# Altium PCB PetBallLauncher.PcbDoc
Units mil, origin at the board's own origin, x right, y up, seen from the top; angles counter-clockwise.
Board outline 1988.19 x 2165.35 mil, 2 copper layers (Top Layer, Bottom Layer); 31 components, 20 nets, 96 pads, 0 vias.
Unrouted connection lines stored in the file: 1.
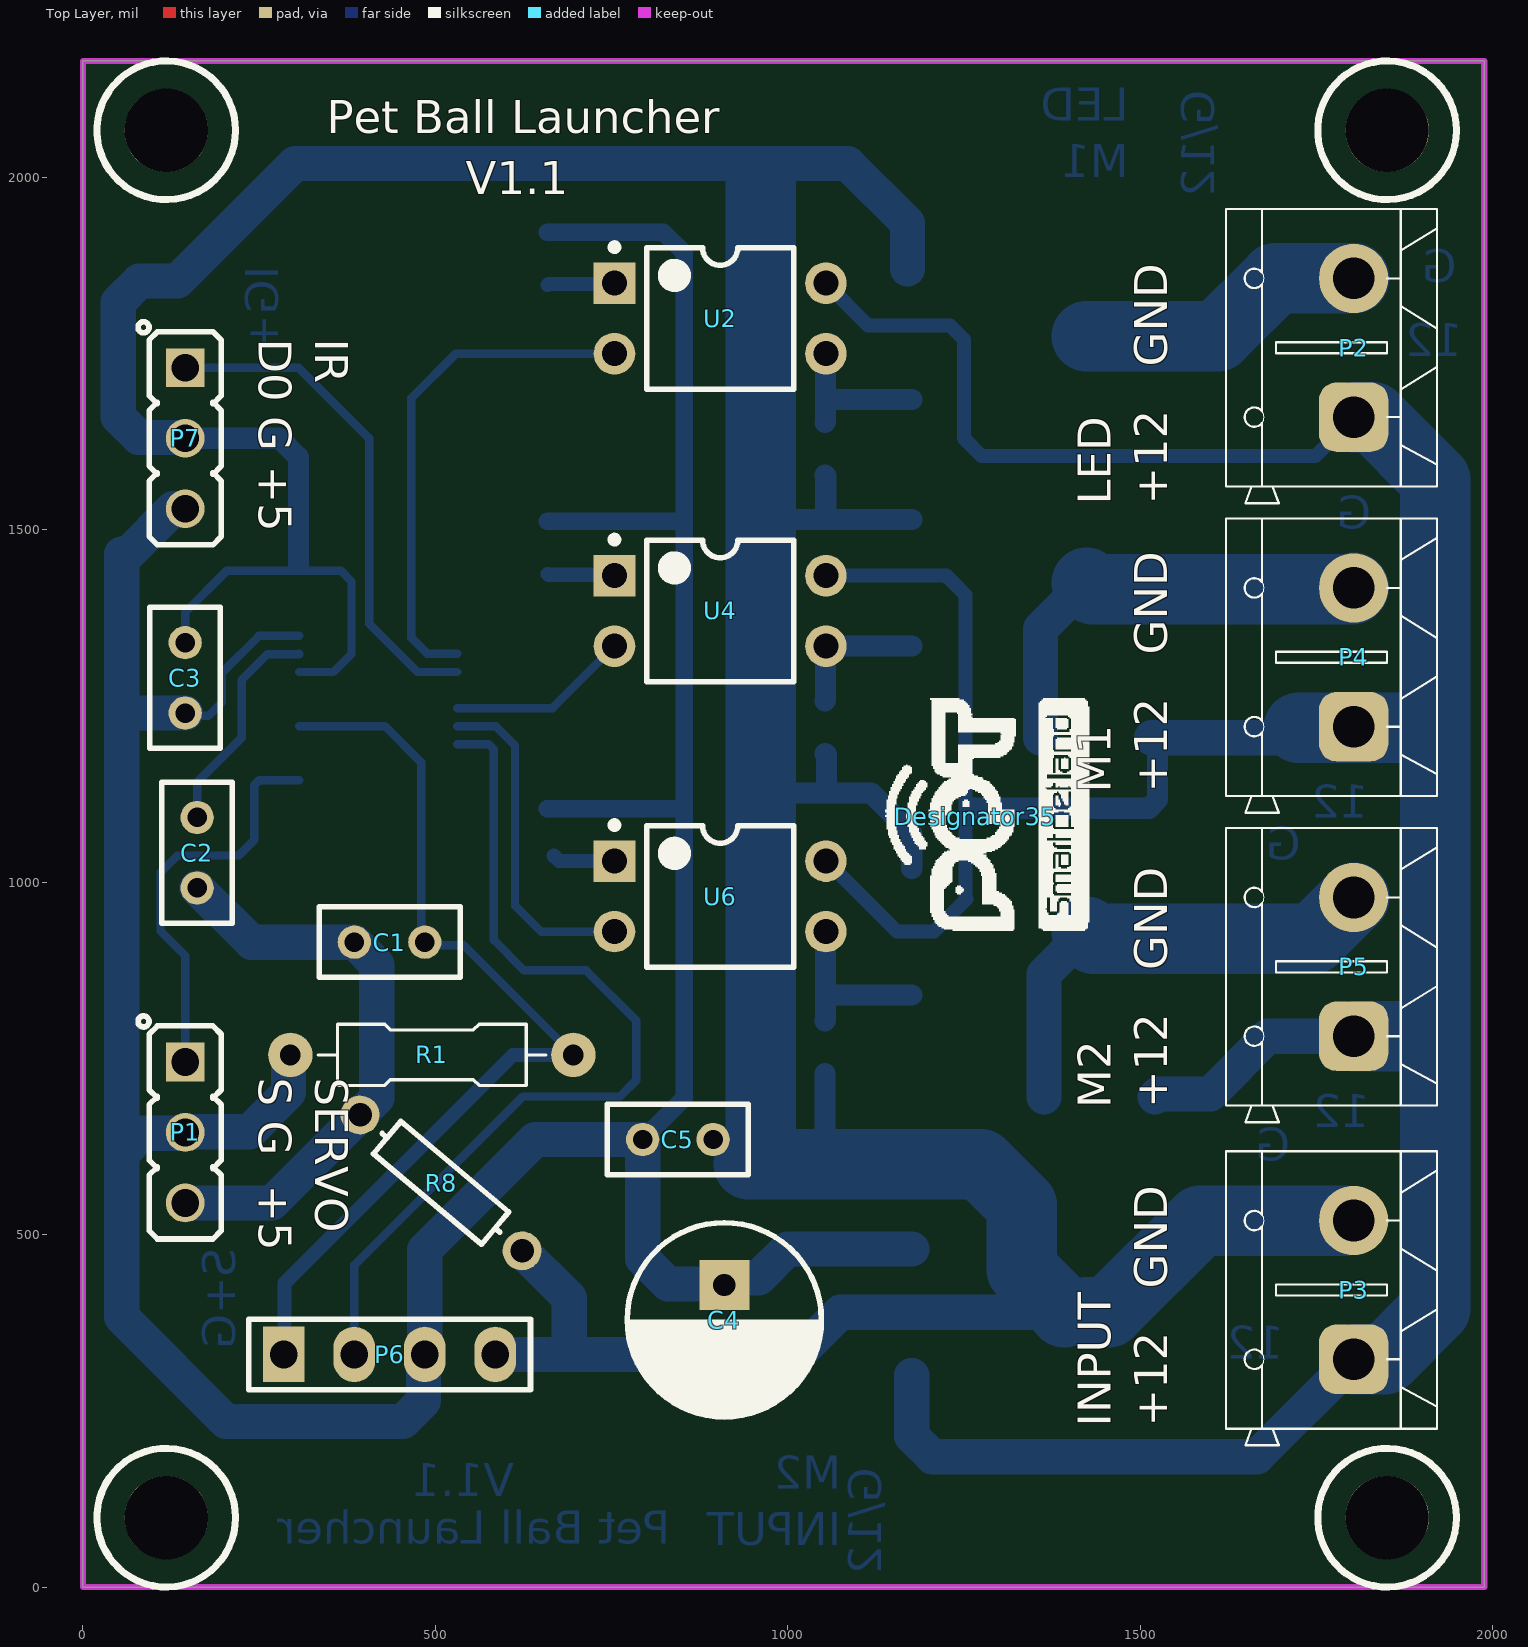
[diagram p0: Top Layer view]
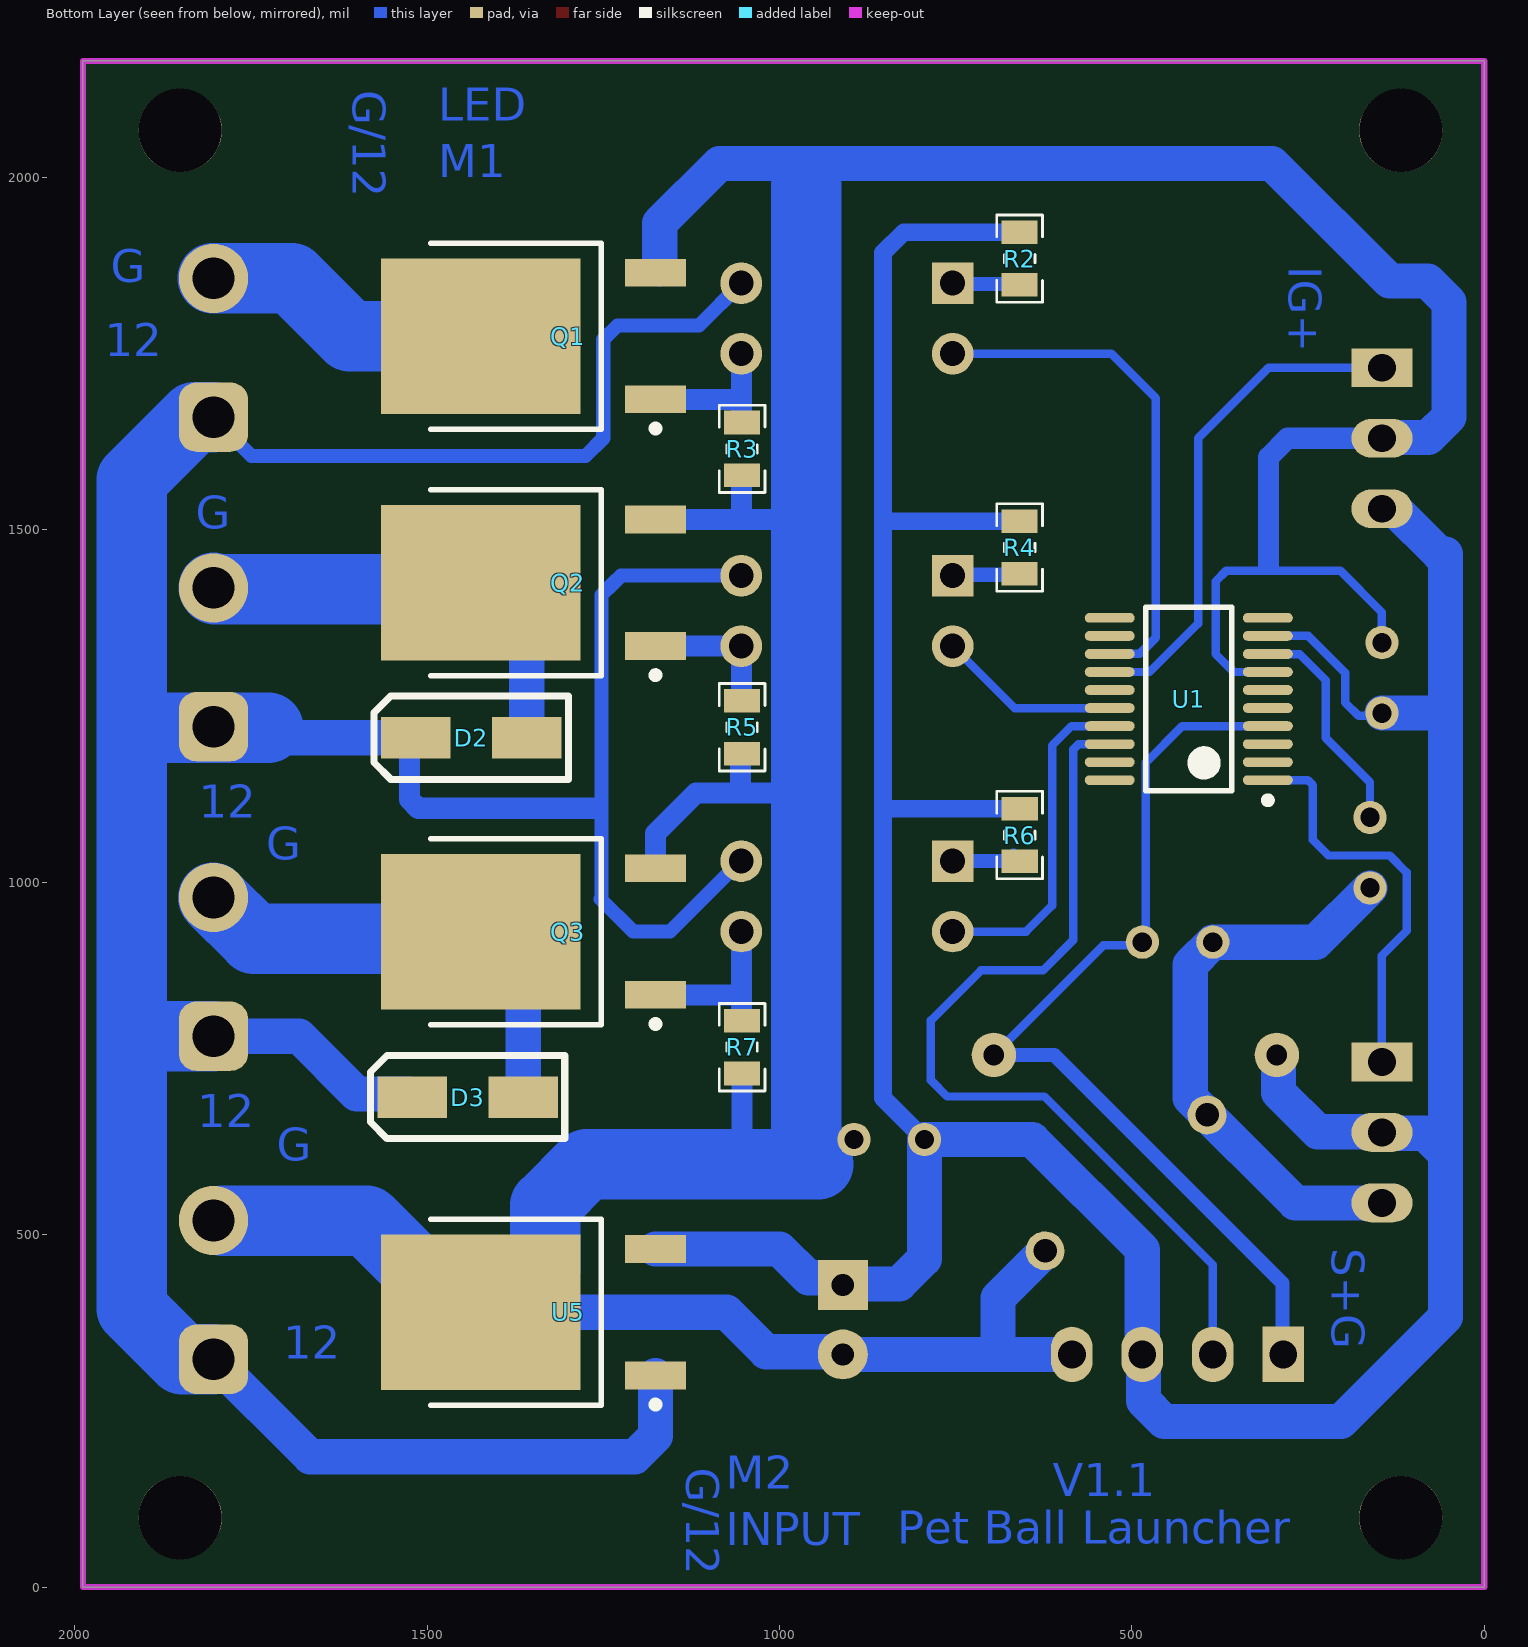
[diagram p1: Bottom Layer view, seen from below]
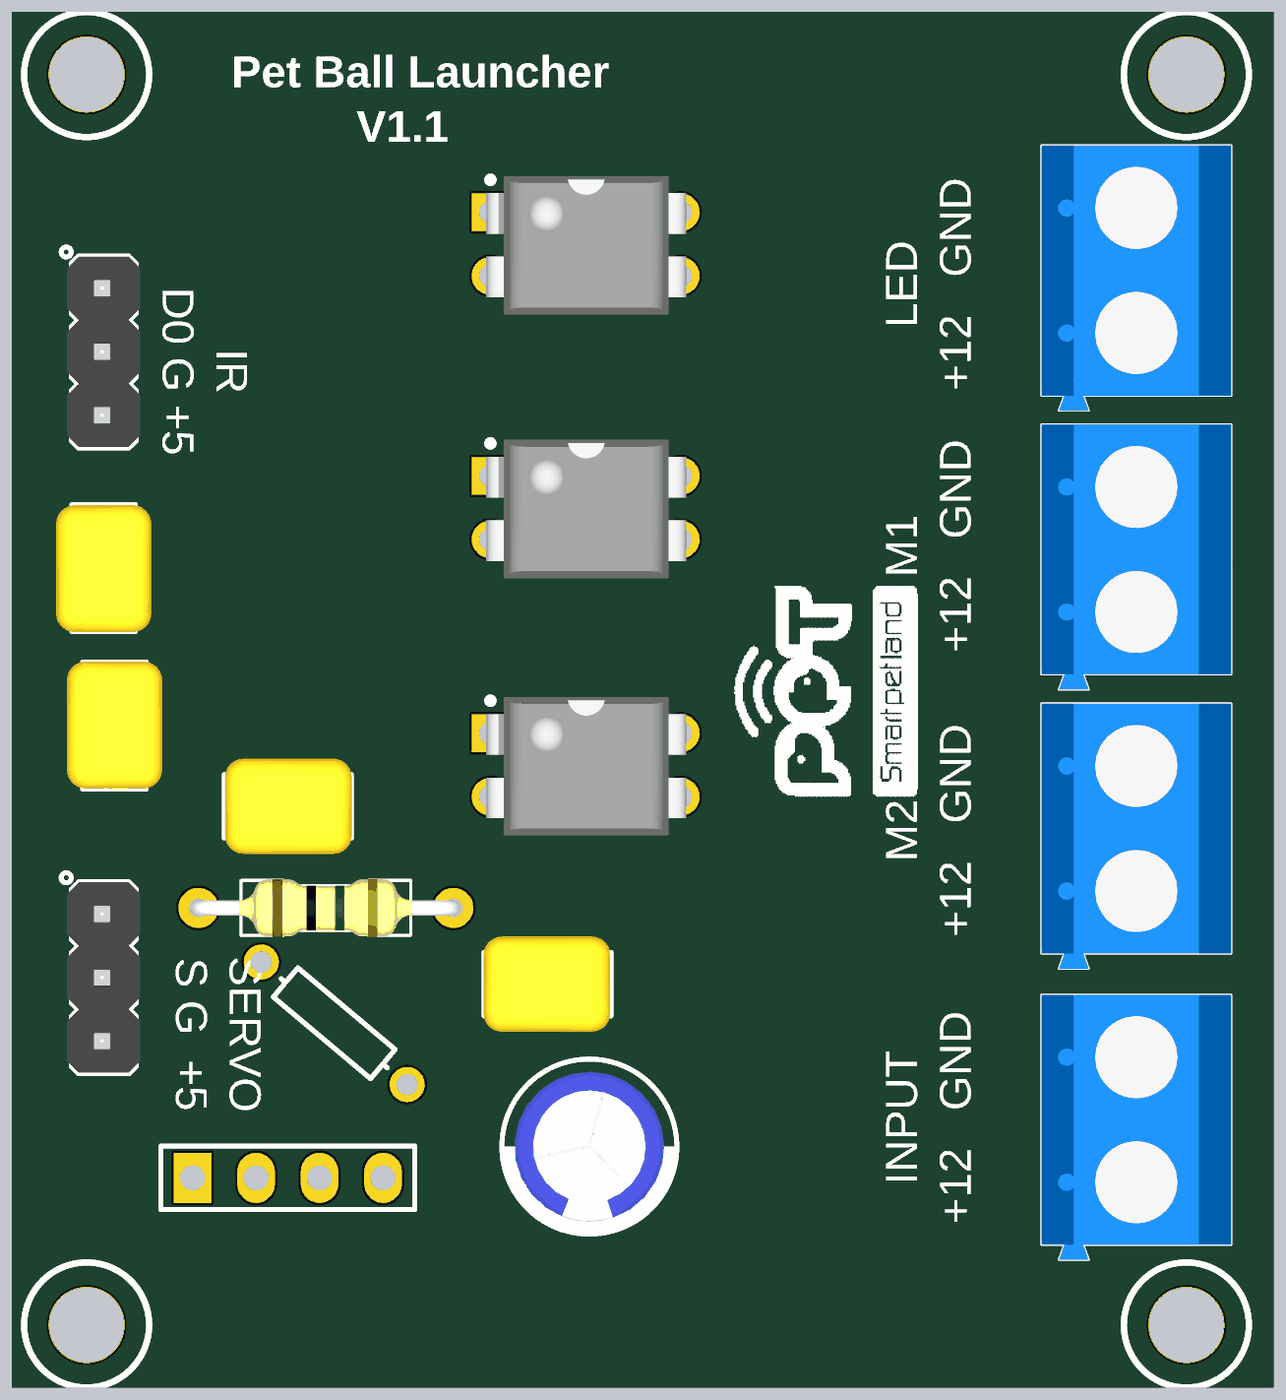
[diagram p2: 3D render of the assembled board from above, using the file's embedded part models]
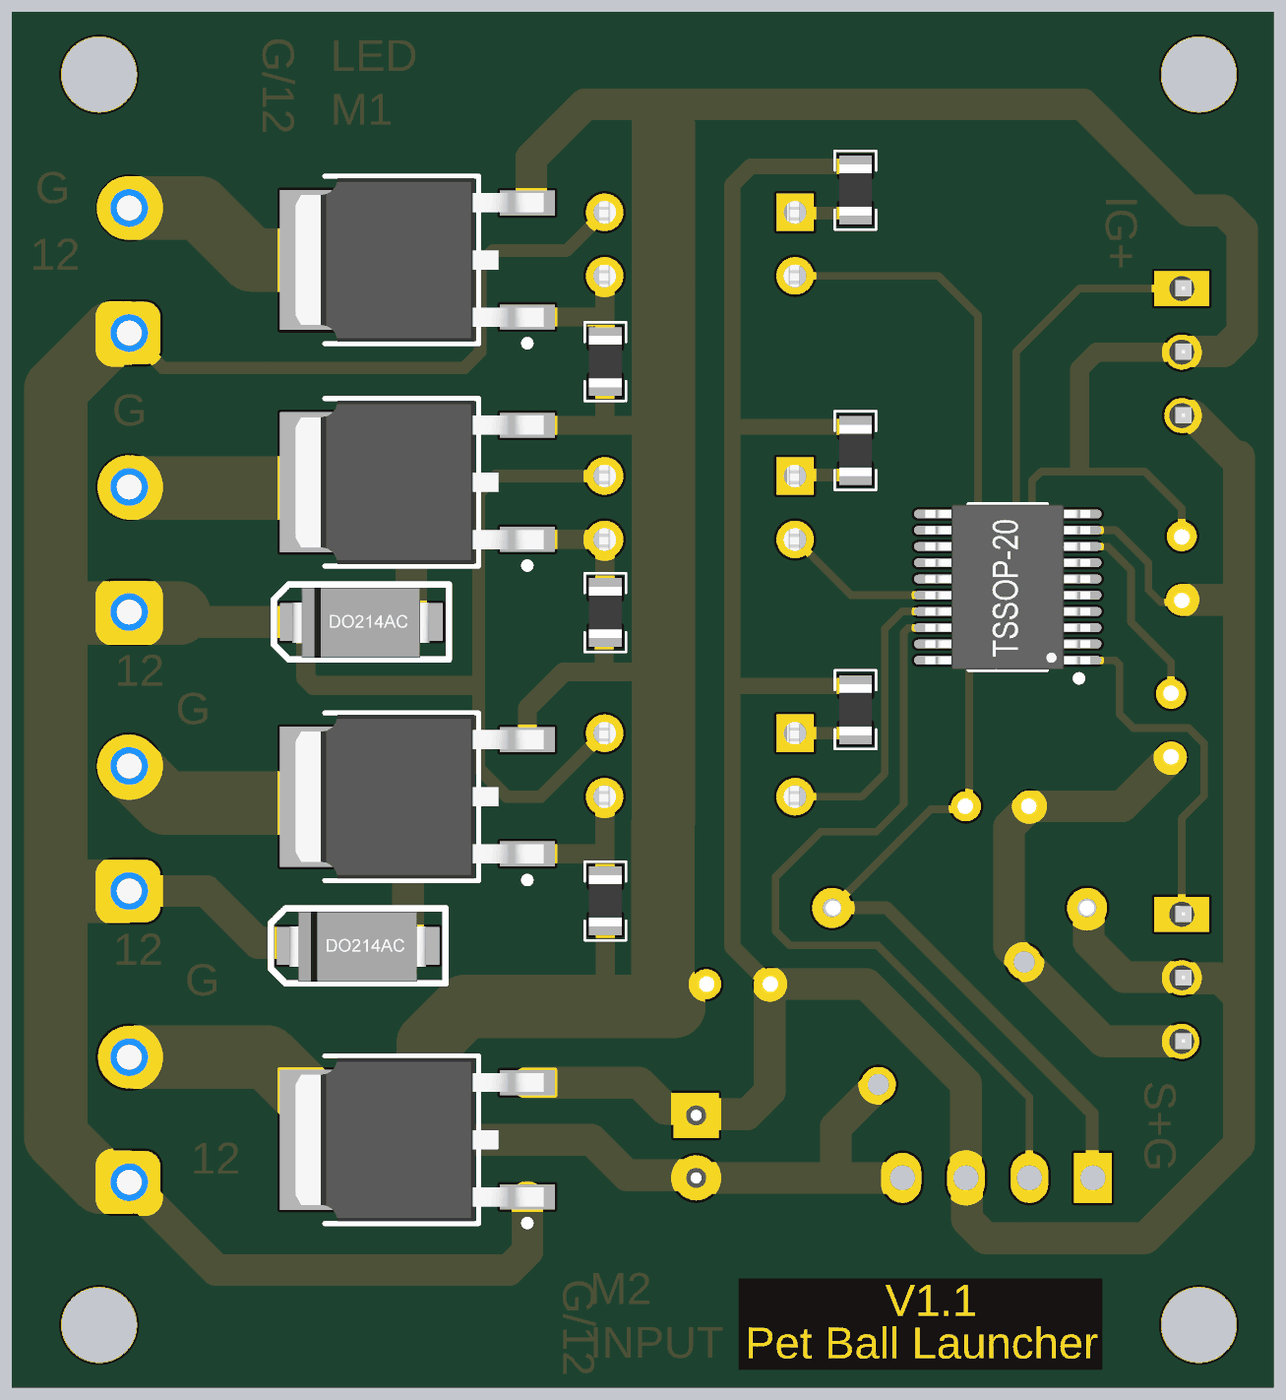
[diagram p3: 3D render of the assembled board from below, using the file's embedded part models]

## Layer stack, top to bottom
Top Solder: solder mask 0.4, Solder Resist, Dk 3.5
Top Layer: signal copper 1.4
Dielectric 1: dielectric 12.6, FR-4, Dk 4.8
Bottom Layer: signal copper 1.4
Bottom Solder: solder mask 0.4, Solder Resist, Dk 3.5

## Board outline
0,0 0,2165.35 1988.19,2165.35 1988.19,0

## Design rules (kind name [scope] priority, off if disabled: settings)
Clearance [All] p1: gap=13 ignorepadtopadclearanceinfootprint=TRUE except(10: Arc-SMDPad Track-SMDPad)
HoleSize [All] p1: absolutevalues=TRUE maxlimit=787.4 minlimit=1 maxpercent=80.000 minpercent=20.000
PolygonConnect [All] p1: connectstyle=Relief reliefconductorwidth=10 reliefentries=4 polygonreliefangle="90 Angle" airgapwidth=10
RoutingVias [All] p1: holewidth=28 width=50 viastyle="Through Hole" minholewidth=28 minwidth=50 maxholewidth=28 maxwidth=50
SolderMaskExpansion [All] p1: expansion=4 istentingtop=FALSE
Width [All] p1: maxlimit=500 minlimit=10 preferedwidth=20 minimp=50.000000 maximp=50.000000 favimp=50.000000
29 further rules are at their usual default settings.

## Components (designator, comment, footprint, x,y, rotation, side; value= is the part's Value field where it differs from the comment)
C1 "Cap" CAP_MLCC_RAD_0.1 435,915 r0 top value=100nF
C2 "Cap" CAP_MLCC_RAD_0.1 162,1042 r90 top value=1uF
C3 "Cap" CAP_MLCC_RAD_0.1 145,1290 r270 top value=100nF
C4 "Cap2" "Cap electrolitic radial 6x7-2.5" 910,379.21 r270 top value=33uF
C5 "Cap" CAP_MLCC_RAD_0.1 844.13,635 r180 top value=100nF
D2 "Diode 1N4007" DO-241AC 1434.13,1205 r0 bottom
D3 "Diode 1N4007" DO-241AC 1439.13,695 r0 bottom
Designator35 "Comment" Logo_SmartPetLand 1266,1094 r90 top
P1 "Servo1" HDR_1x3 145,645 r270 top
P2 "LED" "KF301 2PIN" 1803,1758.43 r90 top
P3 "Header 2" "KF301 2PIN" 1803,421.57 r90 top
P4 "Motor1" "KF301 2PIN" 1803,1319.21 r90 top
P5 "Motor2" "KF301 2PIN" 1803,880 r90 top
P6 "Header 4" HDR1X4 285,330 r0 top
P7 "Inferared" HDR_1x3 145,1630 r270 top
Q1 "IRLR024N" TO252-3M 1349.13,1775 r0 bottom
Q2 "IRLR024N" TO252-3M 1349.13,1425 r0 bottom
Q3 "IRLR024N" TO252-3M 1349.13,930 r0 bottom
R1 "Res1" "Axial 0_25 W, 0_4 IN LEAD PITCH" 495,755 r0 top value=10K
R2 "820R" RES0805 659.13,1885 r270 bottom
R3 "10K" RES0805 1053,1615 r90 bottom
R4 "820R" RES0805 659.13,1475 r270 bottom
R5 "10K" RES0805 1053,1220 r90 bottom
R6 "820R" RES0805 659,1067 r270 bottom
R7 "10K" RES0805 1053,766 r90 bottom
R8 "0R" axial-0.3 508.09,573.42 r320 top value=820R
U1 "STM8S003FP6" TSSOP20 419.13,1260 r0 bottom
U2 "PC817" DIP_4 754.13,1850 r0 top
U4 "PC817" DIP_4 754.13,1435 r0 top
U5 "MC78M05CDT" TO252-3M 1349.13,390 r0 bottom
U6 "PC817" DIP_4 754.13,1030 r0 top

## Footprints (in the part's own frame and the unit in brackets; to place one, negate y for a bottom-side part, rotate by r counter-clockwise, add the part's x,y. Pads: shape width x height; smd on the part's side, far side on the other; paste and mask are expansions set on the pad)
"Axial 0_25 W, 0_4 IN LEAD PITCH" [mm] "Designer Abbas Basereh"
  round 1.6 hole 0.75: 1(5.1,0) 2(-5.1,0)
  silkscreen extent -4.1,-1.1 4.1,1.1, body extent -5.4,-1.16 5.36,1.16, height 3.63
axial-0.3 [mm] "Axial Device, Thru-Hole; 2 Leads; 0.3 in Pin Spacing"
  round 1.4 hole 0.85: 1(-3.81,0) 2(3.81,0)
  silkscreen extent -2.77,-0.76 2.77,0.76
"Cap electrolitic radial 6x7-2.5" [mm] "Cap electrolitic radial 6x7-2.5-Design:Abbas Basereh"
  rect 1.8x1.8 hole 0.8: 1(-1.25,0)
  round 1.8 hole 0.8: 2(1.25,0)
  silkscreen extent -3.5,-3.5 3.6,3.5, body extent -3,-3 3,3, height 7.3
CAP_MLCC_RAD_0.1 [mm]
  round 1.2 hole 0.7: 1(-1.27,0) 2(1.27,0)
  silkscreen extent -2.54,-1.27 2.54,1.27, body extent -2.51,-1.91 2.57,1.91, height 7.36
DIP_4 [mm]
  rect 1.5x1.5 hole 0.9: 1(0,0)
  round 1.5 hole 0.9: 2(0,-2.54) 3(7.62,-2.54) 4(7.62,0)
  silkscreen extent -0.12,-3.82 6.46,1.42, body extent -0.16,-4.09 7.84,1.45, height 4.31
DO-241AC [mm]
  rect 2.5x1.5 smd: 1(-1.918,-0.005) 2(2.082,-0.005)
  silkscreen extent -3.42,-1.5 3.58,1.5, body extent -2.64,-1.37 2.84,1.42, height 2.39
HDR1X4 [mm] "Connector; Header; 4 Position"
  rect 1.5x2 hole 1: 1(0,0)
  oval 1.5x2 hole 1: 2(2.54,0) 3(5.08,0) 4(7.62,0)
  silkscreen extent -1.27,-1.27 8.89,1.27
HDR_1x3 [mm] "Header /Jumper box-Designer Abbas Basereh"
  rect 1.4x1.4 / inner rect 1.4x1.4 / far side rect 1.4x2.2 hole 1 mask+0.1: 1(-2.54,0)
  round 1.4 / inner round 1.4 / far side oval 1.4x2.2 hole 1 mask+0.1: 2(0,0) 3(2.54,0)
  silkscreen extent -4.2,-1.7 3.84,1.3, body extent -3.82,-1.46 3.8,1.46, height 8.61
"KF301 2PIN" [mm] "Designer Abbas Basereh"
  rrect50% 2.5x2.5 hole 1.5: 1(-2.5,0)
  round 2.5 hole 1.5: 2(2.5,0)
  silkscreen extent -5.6,-3 5,4.6, body extent -5.6,-3 5,4.6, height 10
Logo_SmartPetLand [mil]
  silkscreen extent -163,-161 167,127
RES0805 [mm] "Chip Resistor, 2-Leads, Body 2/00x1/25mm, IPC Medium Density DESIGNER:ABBAS BASEREH"
  rect 0.85x1.3 smd: 1(-0.95,0) 2(0.95,0)
  silkscreen extent -1.58,-0.82 1.58,0.82, body extent -1.02,-0.65 1.03,0.65, height 0.5
TO252-3M [mm] "D-PAK, 3-Pads, Body 6.2x6.7mm (max), IPC Low Density"
  rect 2.2x1 smd: 1(-4.4,2.28) 3(-4.4,-2.28)
  rect 7.2x5.6 smd: 4(1.9,0)
  silkscreen extent -4.52,-3.35 3.7,3.45, body extent -5.06,-3.27 4.88,3.27, height 2.39
TSSOP20 [mm]
  oval 1.8x0.35 smd: 1(-2.85,2.925) 2(-2.85,2.275) 3(-2.85,1.625) 4(-2.85,0.975) 5(-2.85,0.325) 6(-2.85,-0.325) 7(-2.85,-0.975) 8(-2.85,-1.625) 9(-2.85,-2.275) 10(-2.85,-2.925) 11(2.85,-2.925) 12(2.85,-2.275) 13(2.85,-1.625) 14(2.85,-0.975) 15(2.85,-0.325) 16(2.85,0.325) 17(2.85,0.975) 18(2.85,1.625) 19(2.85,2.275) 20(2.85,2.925)
  silkscreen extent -2.97,-3.3 1.55,3.77, body extent -3.3,-3.3 3.3,3.3, height 1.2

## Part data
C1 C2 C3 C4 C5: "Capacitor", Publisher="Altium Limited"
  C1 C2 C3 C5: LatestRevisionDate=17-Jul-2002, LatestRevisionNote="Re-released for DXP Platform.", PackageDescription="Radial Cap, Thru-Hole; 2 Leads; 0.3 in Pin Spacing", PackageReference=RAD-0.3, Published=8-Jun-2000
  C4: PackageDescription="Capacitor; 2 Leads", PackageReference=CAPR5-4X5, Published=23-Sep-2002
D2 D3: "1 Amp General Purpose Rectifier", Code_JEDEC=DO-204-AL, ComponentLink1Description="Manufacturer Link", ComponentLink1URL=http://www.fairchildsemi.com/, ComponentLink2Description=Datasheet, ComponentLink2URL=http://www.fairchildsemi.com/ds/1N%2F1N4001.pdf, DatasheetVersion=1998, LatestRevisionDate=17-Jul-2002, LatestRevisionNote="Re-released for DXP Platform.", PackageDescription="Diode, Axial; Body 5.2 x 2.7 mm (LxDia. max), Lead Dia. 0.86 mm (max)", PackageReference=DO-41, PackageVersion=Aug-1999, Published=8-Jun-2000, Publisher="Altium Limited"
P1 P7: library part "Header 3", "Header, 3-Pin", LatestRevisionDate=17-Jul-2002, LatestRevisionNote="Re-released for DXP Platform.", Publisher="Altium Limited"
P2 P4 P5: library part "Header 2", "Header, 2-Pin", LatestRevisionDate=17-Jul-2002, LatestRevisionNote="Re-released for DXP Platform.", Publisher="Altium Limited"
P3: "Header, 2-Pin", LatestRevisionDate=17-Jul-2002, LatestRevisionNote="Re-released for DXP Platform.", Publisher="Altium Limited"
P6: "Header, 4-Pin", LatestRevisionDate=17-Jul-2002, LatestRevisionNote="Re-released for DXP Platform.", Publisher="Altium Limited"
Q1 Q2 Q3: "HEXFET Power MOSFET", Code_JEDEC=TO-252-AA, ComponentLink1Description="Manufacturer Link", ComponentLink1URL=http://www.irf.com/, ComponentLink2Description=Datasheet, ComponentLink2URL=http://www.irf.com/product-info/datasheets/data/irlr024n.pdf, LatestRevisionDate=20-Nov-2009, LatestRevisionNote="IPC-7351 Footprint Added.", Note="Pin 2 is trimmed and is electrically connected to Drain.", PackageDescription="3-Pin HEXFET Package 2.28 mm Pitch, 9.9 mm Lead Span", PackageReference=TO-252AA, PackageVersion=Feb-2003, Published=8-Jun-2000, Publisher="Altium Limited"
R1: "Resistor", LatestRevisionDate=17-Jul-2002, LatestRevisionNote="Re-released for DXP Platform.", PackageDescription="Axial Device, Thru-Hole; 2 Leads; 0.3 in Pin Spacing", PackageReference=AXIAL-0.3, Published=8-Jun-2000, Publisher="Altium Limited"
R2 R3 R4 R5 R6 R7 R8: library part Res1, "Resistor", LatestRevisionDate=17-Jul-2002, LatestRevisionNote="Re-released for DXP Platform.", PackageDescription="Axial Device, Thru-Hole; 2 Leads; 0.3 in Pin Spacing", PackageReference=AXIAL-0.3, Published=8-Jun-2000, Publisher="Altium Limited"
U1: library part STM8S003F3Px, "8 bit microcontroller"
U2 U4 U6: library part Optoisolator1, "4-Pin Phototransistor Optocoupler", DatasheetVersion=Nov-2003, LatestRevisionDate=04-Mar-2005, LatestRevisionNote="Sch pins 3 & 4 Swapped.", PackageReference=DIP-4, Published=24-Mar-1999, Publisher="Altium Limited"
U5: "3-Terminal Medium-Current Positive Fixed Voltage Regulator", ComponentLink1Description="Manufacturer Link", ComponentLink1URL=http://www.onsemi.com/site/products/taxonomy/0,4438,503,00.html, ComponentLink2Description=Datasheet, ComponentLink2URL=http://www.onsemi.com/pub/Collateral/MC78M00-D.PDF, DatasheetVersion=1988, Note="Heatsink suface connected to pin 4.", PackageDescription="D-PAK/TO-252-AA; 3 Leads (1 Cropped); Body 10.2 (inc. leads) x 6.7 mm (LxW max)", PackageReference=369A-03, Published=17-Jul-2002, Publisher="Altium Limited"

## Free pads (board coordinates)
  round 118.11 hole 118.11: 21(118.11,98.43) 21(118.11,2066.93) 21(1850.39,98.43) 21(1850.39,2066.93)

## Nets (pads, with @x,y where several pads share a name; then routed paths per layer and width w, separated by ;. In a path a pad name is that pad's centre, name@x,y a point inside that pad or via, vN(x,y) a via of type N, cw(c..) or ccw(c..) an arc to the next point about the centre after c; other vN are vias at no path point)
+12V: D2.2 D3.2 P2.1 P3.1 P4.1 P5.1 U2.4 U4.4 U5.1 U6.4 | length 5359.3
  Bottom Layer w20: U4.4 1225,1435 1234.99,1425.01 1252.49,1407.51 1252.49,976.29 ; U2.4 1114.13,1790 1230,1790 1250,1770 1250,1630 1275,1605 1749.13,1605 P2.1@1804.13,1660 ; U6.4@1055,1030 1155,930 1207.43,930 1253.71,976.29
  Bottom Layer w30: U6.4 U6.4@1055,1030 ; 1258.71,1105 1512.43,1105 1524.75,1117.32 1524.75,1196.55 D2.2
  Bottom Layer w50: U5.1 1175.91,214.29 1205.19,185 1665.98,185 P3.1@1804.13,323.15 ; D2.2 P4.1@1772,1205.18 ; D3.2 1525.65,699.71 1599.71,699.71 1681.57,781.57 P5.1 P5.1@1804.13,781.57
  Bottom Layer w100: 1725,1219 1725.17,1219.17 1918.69,1219.17 ; P3.1@1804.13,323.15 1847.15,323.15 1918.69,394.69 1918.69,780 ; P5.1@1804.13,781.57 1917.11,781.57 1918.69,780 ; P2.1@1804.13,1660 1830.11,1660 1918.69,1571.42 1918.69,1219.17 ; 1918.69,780 1918.69,1219.17
GND: C1.1 C2.1 C3.1 C4.2 C5.1 P1.3 P3.2 P6.4 P7.2 Q1.3 Q2.3 Q3.3 R3.1 R5.1 R7.1 R8.1 R8.2 U1.7 U5.4 | length 7401.3
  Bottom Layer w12: C3.1 145,1383 204,1442 366,1442 381,1427 381,1324 355.39,1298.39 U1.7
  Bottom Layer w30: P7.2 279,1630 306,1603 306,1451 ; 961.61,1138 973.11,1126.5 1118.5,1126.5 1175.91,1069.09 Q3.3 ; 962,1514.76 1054,1514.76 ; 1053,600 R7.1 ; R5.1 1053.27,1182.6 1055,1180.87 1055,1138 ; R3.1 1054,1576.6 1054,1514.76 ; Q2.3 1054,1514.76
  Bottom Layer w50: P1.3 268,545 417,694 417,883 C1.1 239,915 C2.1 ; P7.2 144.02,1630.98 79.29,1630.98 50,1660.27 50,1823 80,1853 134,1853 301,2020 1085,2020 1169.78,1935.22 Q1.3@1169.78,1870.08 ; P6.4 690,330 ; R8.2 690,410 690,330 ; 945,600 962,617 ; U5.4 1392.44,390 1075,390 1018.99,333.99 913.99,333.99 C4.2 690,330
  Bottom Layer w100: 945,600 1053,600 1273.63,600 1332.2,541.42 1332.2,450.24 U5.4@1392.44,390 ; 961.61,1988 961.61,1138 961.61,891.67 962,891.28 962,617 ; U5.4 1455.43,390 1585.43,520 P3.2@1790,520
IR_DO: P7.1 U1.14 | length 719.2
  Bottom Layer w12: P7.1 306,1730 406,1630 406,1367 474.61,1298.39 U1.14
LED: U1.13 U2.2 | length 729.1
  Bottom Layer w12: U1.13 531,1324.32 488.68,1324.32 466,1347 466,1687 529,1750 U2.2
MOTOR1: U1.16 U4.2 | length 259.2
  Bottom Layer w12: U1.16 666.34,1247.2 U4.2
MOTOR2: U1.17 U6.2 | length 476.6
  Bottom Layer w12: U1.17 585.39,1221.61 613,1194.01 613,967 650,930 U6.2
NetC2_2: C2.2 U1.8 | length 318.2
  Bottom Layer w12: C2.2 162,1142 225,1205 225,1286.82 261.82,1323.64 306.59,1323.64 U1.8
NetD2_1: D2.1 P4.2 Q2.4 | length 630.3
  Bottom Layer w50: D2.1 1358.64,1359.7 Q2.4
  Bottom Layer w100: Q2.4 1432.94,1416 1801.36,1416 P4.2
NetD3_1: D3.1 P5.2 Q3.4 | length 667.7
  Bottom Layer w50: D3.1 1363.64,869.7 Q3.4
  Bottom Layer w100: Q3.4 1433.94,920 1745.71,920 P5.2@1803.69,977.98
NetP2_2: P2.2 Q1.4 | length 414.1
  Bottom Layer w100: Q1.4 1610,1775 1691.85,1856.85 P2.2@1804.13,1856.85
NetQ1_1: Q1.1 R3.2 U2.3 | length 220.5
  Bottom Layer w30: R3.2 1053.57,1652.97 1053.57,1685 ; U2.3 1053.57,1749.43 1053.57,1685 ; Q1.1 1053.8,1685.24 1053.57,1685
NetQ2_1: Q2.1 R5.2 U4.3 | length 199.9
  Bottom Layer w30: R5.2 1053.57,1257.97 1053.57,1334.43 U4.3 1054.25,1335.12 1175.79,1335.12 Q2.1
NetQ3_1: Q3.1 R7.2 U6.3 | length 234.3
  Bottom Layer w30: R7.2 1053.57,803.97 1053.57,929.43 U6.3 ; 1068.69,840.24 Q3.1
NetR2_2: R2.2 U2.1 | length 96
  Bottom Layer w20: R2.2 660.33,1848.8 752.93,1848.8 U2.1
NetR4_2: R4.2 U4.1 | length 96.1
  Bottom Layer w20: R4.2 660.43,1436.3 752.83,1436.3 U4.1
NetR6_2: R6.2 U6.1 | length 89.3
  Bottom Layer w20: R6.2@667.99,1037.6 675.59,1030 U6.1
NRST: C1.2 P6.1 R1.1 U1.4 | length 1374
  Bottom Layer w12: U1.4 428.39,1221.61 479.91,1170.09 479.91,920.09 C1.2 489.63,910.37 540.42,910.37 R1.1
  Bottom Layer w20: P6.1 286,331 286,431 610,755 R1.1
PWM_SERVO1: P1.1 U1.1 | length 580.2
  Bottom Layer w12: P1.1 145,896 110,931 110,1013.97 134.03,1038 221,1038 243,1060 243,1137.81 250.03,1144.84 U1.1
SWIM: P6.2 U1.18 | length 1295.1
  Bottom Layer w12: P6.2 385,457 624,696 762,696 785,719 785,804 714,875 626,875 583,918 583,1188.65 575.97,1195.68 531.68,1195.68 U1.18
VCC: C3.2 C4.1 C5.2 P1.2 P6.3 P7.3 R1.2 R2.1 R4.1 R6.1 U1.9 U5.3 | length 5392.6
  Bottom Layer w12: C3.2 149,1236 178,1236 197.28,1255.28 197.28,1297.28 249.57,1349.57 U1.9
  Bottom Layer w25: R6.1 852.6,1104.4 853,1104 ; R4.1 839.1,1512.4 ; R2.1 823.6,1922.4 853,1893 853,1104 ; C5.2 853,693.87 853,1104
  Bottom Layer w50: C3.2 55,1240 ; P7.3 127.87,1530 63.58,1465.71 55,1465.71 55,1240 ; R1.2 291.73,752.52 291.73,701.73 235.98,645.98 140.98,645.98 139.02,644.02 84.29,644.02 55,614.73 ; U5.3 999.76,479.76 958.86,438.86 920.43,438.86 C4.1 908.43,430 830,430 794.13,465.87 C5.2 641.29,635 485,478.71 P6.3 483.27,328.27 483.27,264.29 453.98,235 203,235 55,383 55,614.73 ; 55,614.73 55,1240
pads on no net: U1.2 U1.3 U1.5 U1.6 U1.10 U1.11 U1.12 U1.15 U1.19 U1.20

## Keep-outs
Keep-Out Layer:
  the board outline again, w9

## Other copper
Bottom Layer:
  text "G/12" at 1621,2124 h80 r90
  text "LED / M1" at 1484,1985 h80
  text "IG+" at 293,1874 h80 r90
  text "G" at 1949,1836 h80
  text "12" at 1957,1731 h80
  text "G" at 1828,1486 h80
  text "12" at 1824,1076 h80
  text "G" at 1728,1016 h80
  text "12" at 1826,637 h80
  text "G" at 1713,589 h80
  text "S+G" at 232,481 h80 r90
  text "12" at 1704,308 h80
  text "G/12" at 1148,169 h80 r90
  text "V1.1" at 611.92,113 h80
  text "Pet Ball Launcher" at 833,45.86 h80
  text "M2 / INPUT" at 1076,44 h80

## Silkscreen, mask and mechanical layers (free items; w line width, h text height)
Top Overlay:
  circle w10: c1850.39,98.43 r98.43
  circle w10: c118.11,98.43 r98.43
  circle w10: c118.11,2066.93 r98.43
  circle w10: c1850.39,2066.93 r98.43
  text "Pet Ball Launcher" at 346,2046.94 h80
  text "V1.1" at 543,1961 h80
  text "IR / D0 G +5" at 234,1771 h80 r270
  text "LED / +12   GND" at 1554,1535.5 h80 r90
  text "M1 / +12   GND" at 1554,1127.21 h80 r90
  text "SERVO / S G  +5" at 234,722.33 h80 r270
  text "M2 / +12   GND" at 1554,679.21 h80 r90
  text "INPUT / +12   GND" at 1554,227.21 h80 r90
Bottom Solder:
  region: 843,172 270,172 270,28 843,28

## Dimensions
0,0 to 0,2165.35 on Mechanical 15
0,0 to 1988.19,0 on Mechanical 15